# Altium PCB REDESIGN.PcbDoc
Units mil, origin at the board's own origin, x right, y up, seen from the top; angles counter-clockwise.
Board outline 3007 x 6280 mil, 2 copper layers (Top Layer, Bottom Layer); 69 components, 59 nets, 325 pads, 16 vias.
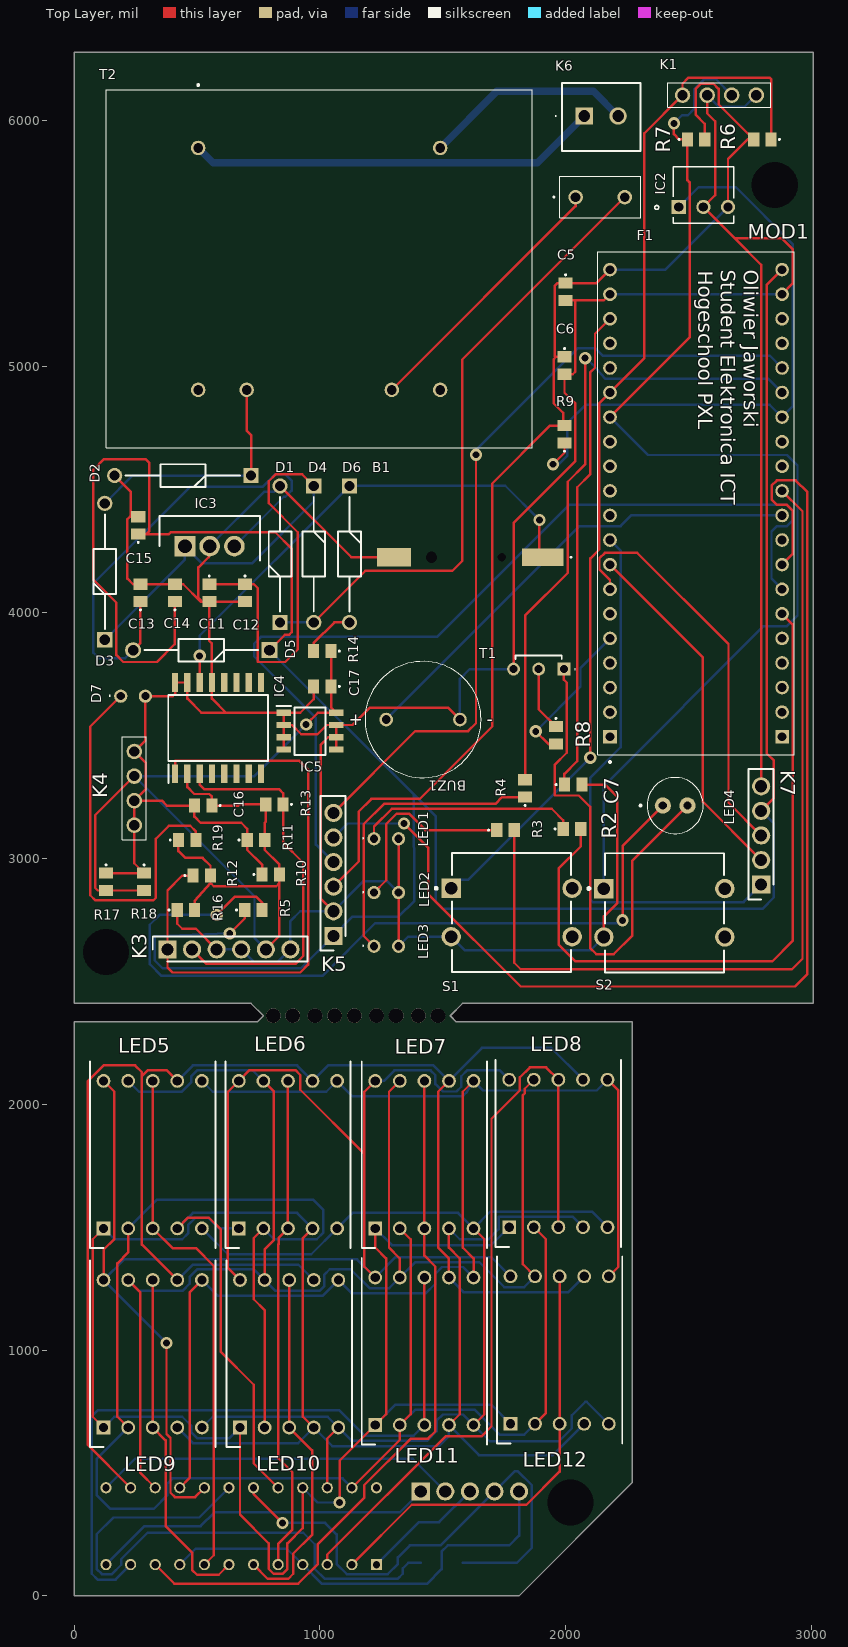
[diagram p0: Top Layer view]
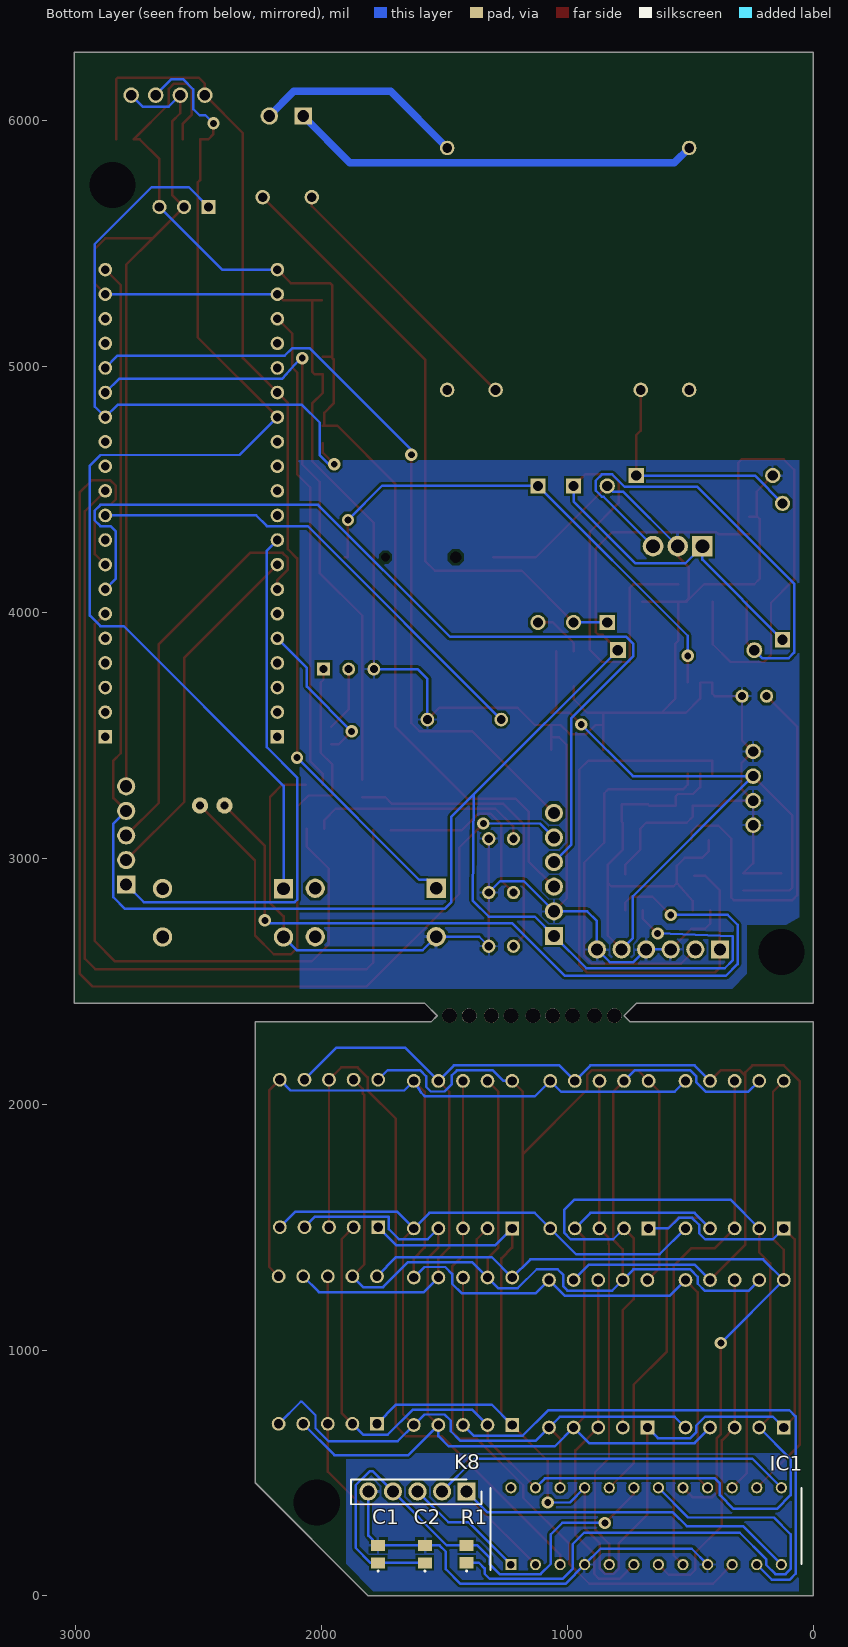
[diagram p1: Bottom Layer view, seen from below]
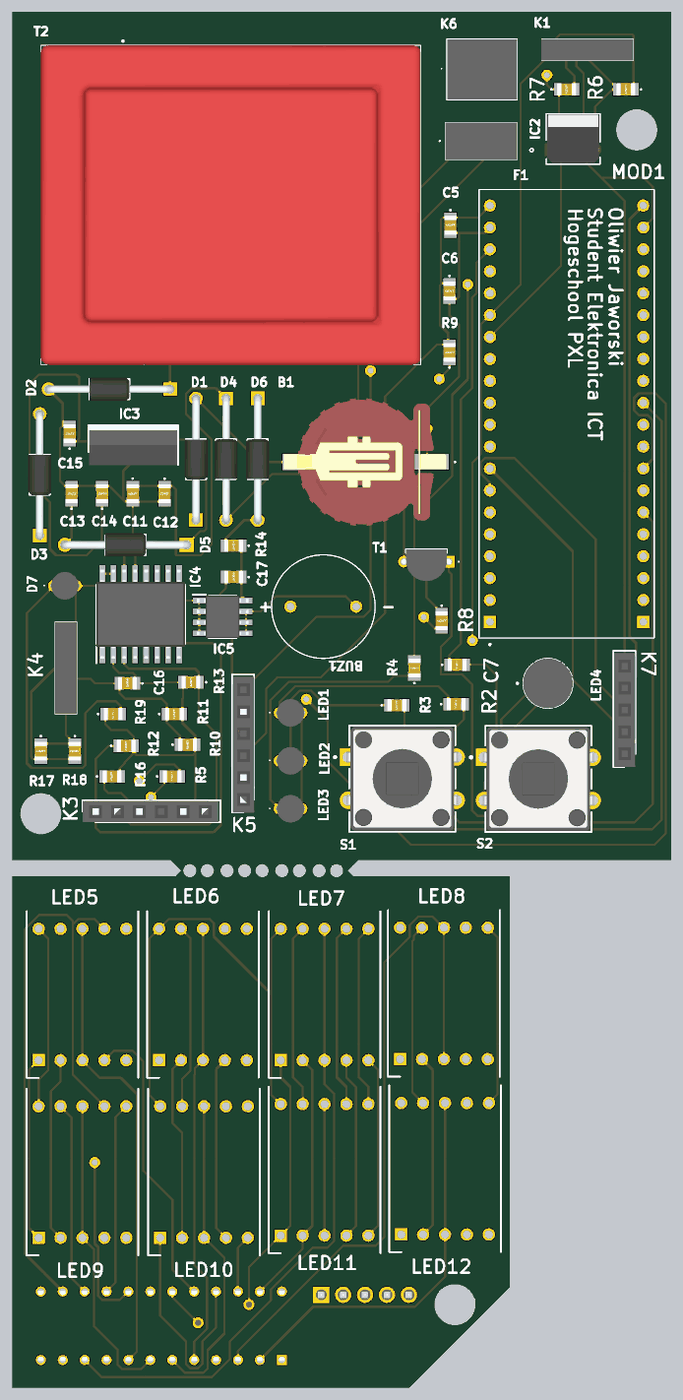
[diagram p2: 3D render of the assembled board from above, using the file's embedded part models]
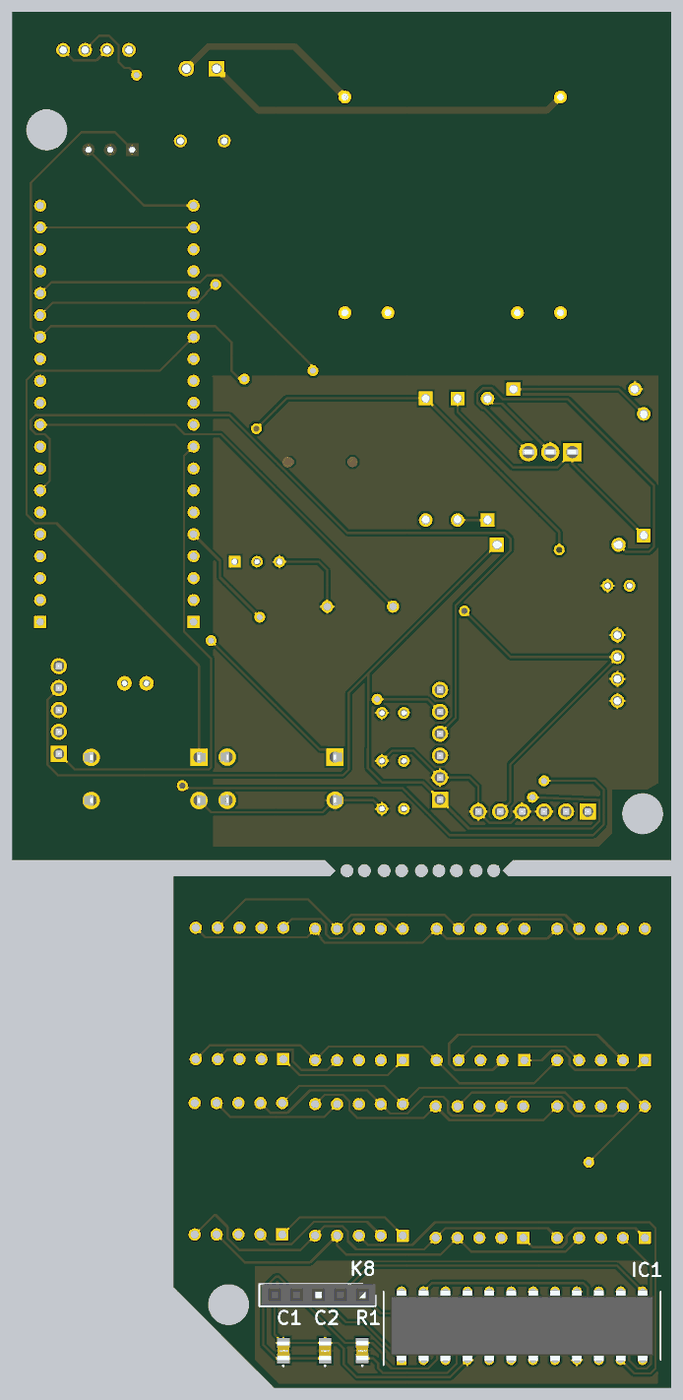
[diagram p3: 3D render of the assembled board from below, using the file's embedded part models]

## Layer stack, top to bottom
Top Solder: solder mask 0.4, Solder Resist, Dk 3.5
Top Layer: signal copper 1.4
Dielectric 1: dielectric 12.6, FR-4, Dk 4.8
Bottom Layer: signal copper 1.4
Bottom Solder: solder mask 0.4, Solder Resist, Dk 3.5

## Board outline
0,2410 720,2410 770,2360 745,2335 0,2335 0,0 1810,0 2270,460 2270,2335 1555,2335 1530,2360 1580,2410 3007,2410 3007,6280 0,6280

## Design rules (kind name [scope] priority, off if disabled: settings)
Clearance [All] p1: gap=10 ignorepadtopadclearanceinfootprint=FALSE
Height [All] p1: minheight=0 maxheight=2000 prefheight=500
HoleSize [All] p1: absolutevalues=TRUE maxlimit=200 minlimit=1 maxpercent=80.000 minpercent=20.000
MinimumSolderMaskSliver [All] p1: minsoldermaskwidth=5
PolygonConnect [All] p1: connectstyle=Relief reliefconductorwidth=10 reliefentries=4 polygonreliefangle="90 Angle" airgapwidth=10
RoutingVias [All] p1: holewidth=28 width=50 viastyle="Through Hole" minholewidth=28 minwidth=50 maxholewidth=28 maxwidth=50
SilkToSolderMaskClearance [IsPad] p1: minsilkscreentomaskgap=4 clearancetoexposedcopper=TRUE
SolderMaskExpansion [All] p1: expansion=4 istentingtop=FALSE
Width [All] p1: maxlimit=30 minlimit=10 preferedwidth=10 minimp=50.000000 maximp=50.000000 favimp=50.000000
26 further rules are at their usual default settings.

## Classes and differential pairs
component class RTC_unit: B1 C16 C17 D6 D7 IC4 IC5 K3 K4 R10 R11 R12 R13 R14 R16 R17 R18 R19
component class Processing_Unit: BUZ1 C5 C6 C7 IC2 K1 K5 K7 LED1 LED2 LED3 LED4 MOD1 R2 R3 R4 R5 R6 R7 R8 R9 S1 S2 T1
component class Power_Unit: C11 C12 C13 C14 C15 D1 D2 D3 D4 D5 F1 IC3 K6 T2
component class Display_Unit: C1 C2 IC1 K8 LED5 LED6 LED7 LED8 LED9 LED10 LED11 LED12 R1

## Components (designator, comment, footprint, x,y, rotation, side; value= is the part's Value field where it differs from the comment)
B1 "CR1220" CR1220HSMD 1602.06,4225 r180 top
BUZ1 "CEM-1212S" CUI_CEM-1212S 1419.61,3565 r0 top
C1 "100uF | 16V" C0805 1770,170 r90 bottom
C2 "100nF | 16V" C0805 1580,170 r90 bottom
C5 "47uF | 16V" C0805 1999.7,5305 r270 top
C6 "100nF" C0805 1995,5005 r270 top
C7 "1uF | 16V" C0805 2030,3300 r0 top
C11 "470uF" C0805 550,4080 r270 top
C12 "0.1uF" C0805 695,4080 r270 top
C13 "0.1uF" C0805 270,4080 r90 top
C14 "100nF" C0805 410.07,4080 r90 top
C15 "220uF | 16v" C0805 260.99,4354.57 r90 top
C16 "0.1uF" C0805 525,3215 r180 top
C17 "1uF" C0805 1010,3700 r180 top
D1 "1N4001" DIOAD1405W86L465D235 838.1,3959.88 r90 top
D2 "1N4001" DIOAD1405W86L465D235 720.12,4557.16 r180 top
D3 "1N4001" DIOAD1405W86L465D235 125,3889.19 r90 top
D4 "1N4001" DIOAD1405W86L465D235 975,4515 r270 top
D5 "1N5817" 1n5817_footprint 795.12,3847 r180 top
D6 "1N4148,133" DIOAD1405W86L465D235 1120,4515.12 r270 top
D7 "TLHO4200" TLHO4200 240,3660 r0 top
F1 "MCMSF_1A_250V" MCMSF1A250V 2040,5690 r0 top
IC1 "MAX7219CNG" DIP794W56P254L3054H457Q24N 680,283.7 r90 bottom
IC2 "TSOP34338" TO_TSOP31236 2660,5748 r0 top
IC3 "L78M05CP" TO255P460X1020X2030-3P 451.12,4270 r0 top
IC4 "DS3231SN#" SOIC127P1032X265-16N 585.76,3530 r90 top
IC5 "AT24C32D-SSHM-B" SOIC127P600X175-8N 960,3517.75 r0 top
K1 "2212S-04SG-85" 2212S04SG85 2475,6105 r0 top
K3 "2212S-06SG-85" RHDR6W74P0X254_1X6_1574X250X850P 380,2630 r0 top
K4 "2212S-04SG-85" 2212S04SG85 245,3135 r90 top
K5 "2212S-06SG-85" RHDR6W74P0X254_1X6_1574X250X850P 1055,2685 r90 top
K6 "OSTTE020104" OSTTE020104 2075,6020 r0 top
K7 "2212S-05SG-85" RHDR5W74P0X254_1X5_1320X250X850P 2795,2893.45 r90 top
K8 "2212S-05SG-85" RHDR5W74P0X254_1X5_1320X250X850P 1410,425 r0 bottom
LED1 "TLHO4200" TLHO4200 1270,3080 r0 top
LED2 "TLHO4200" TLHO4200 1270,2861.33 r0 top
LED3 "TLHO4200" TLHO4200 1270,2642.66 r0 top
LED4 "TSAL6400" TSAL6400 2395,3215 r0 top
LED5 "SC56-11EWA" DIPS1524W75P254L1270H825Q10N 120,1495 r90 top
LED6 "SC56-11EWA" DIPS1524W75P254L1270H825Q10N 670,1495 r90 top
LED7 "SC56-11EWA" DIPS1524W75P254L1270H825Q10N 1225,1495 r90 top
LED8 "SC56-11EWA" DIPS1524W75P254L1270H825Q10N 1770,1500 r90 top
LED9 "SC56-11EWA" DIPS1524W75P254L1270H825Q10N 120,685 r90 top
LED10 "SC56-11EWA" DIPS1524W75P254L1270H825Q10N 675,685 r90 top
LED11 "SC56-11EWA" DIPS1524W75P254L1270H825Q10N 1225,695 r90 top
LED12 "SC56-11EWA" DIPS1524W75P254L1270H825Q10N 1775,700 r90 top
MOD1 "ESP32-PICO-KIT-V4.1" XCVR_ESP32-PICO-KIT-V4.1 2530,4445 r90 top
R1 "47K" C0805 1410,170.43 r90 bottom
R2 "820R" C0805 2025.43,3120 r0 top
R3 "330R" C0805 1755,3115 r0 top
R4 "330R" C0805 1835,3284.57 r90 top
R5 "22R" C0805 729.57,2790 r0 top
R6 "10K" C0805 2800,5925 r180 top
R7 "10K" C0805 2530,5925 r0 top
R8 "330R" C0805 1960,3500.43 r270 top
R9 "10K" C0805 1995,4725 r90 top
R10 "4.7k" C0805 800,2935 r0 top
R11 "4.7k" C0805 740,3075 r0 top
R12 "4.7k" C0805 519.57,2929.93 r0 top
R13 "4.7k" C0805 815,3220 r180 top
R14 "220R" C0805 1010,3843.1 r180 top
R16 "4.7k" C0805 455,2790 r0 top
R17 "4.7k" C0805 130,2905 r270 top
R18 "4.7k" C0805 285,2905 r270 top
R19 "1K" C0805 460,3075 r0 top
S1 "FSM103" FP-FSM103-MFG 1780,2779.97 r180 top
S2 "FSM103" FP-FSM103-MFG 2401.06,2778.84 r180 top
T1 "BC33716TA" BC33716TA 1992.36,3770 r180 top
T2 "44230" 44230 505,5890 r0 top

## Footprints (in the part's own frame and the unit in brackets; to place one, negate y for a bottom-side part, rotate by r counter-clockwise, add the part's x,y. Pads: shape width x height; smd on the part's side, far side on the other; paste and mask are expansions set on the pad)
1n5817_footprint [mm]
  rect 1.65x1.65 hole 1.1: 1(0,0)
  round 1.65 hole 1.1: 2(14.1,0)
  silkscreen extent 1.18,-1.18 12.92,1.18, body extent -0.45,-1.34 14.55,1.34, height 2.7
2212S04SG85 [mm]
  round 1.605 hole 1.07: 1(0,0) 2(2.54,0) 3(5.08,0) 4(7.62,0)
  silkscreen extent -1.52,-1.25 9.14,1.25, body extent -1.52,-1.25 9.14,1.25, height 8.8
44230 [mm]
  round 1.5 hole 1: 1(0,0) 5(25,0) 6(25,-25) 7(20,-25) 9(5,-25) 10(0,-25)
  silkscreen extent -9.5,-31 34.5,6.6, body extent -9.5,-31 34.5,6, height 32.3
BC33716TA [mm]
  rect 1.333x1.333 hole 0.82: 1(0,0)
  round 1.333 hole 0.82: 2(2.6,0) 3(5.2,0)
  silkscreen extent -1.2,-1.43 4.98,0.05, body extent -0.31,-1.43 5.51,2.25, height 8.87
C0805 [mm]
  rect 1.15x1.45 smd: 1(-0.9,0) 2(0.9,0)
  silkscreen extent -1.8,-0.05 -1.7,0.05, body extent -1.1,-0.73 1.1,0.72, height 1.4
CR1220HSMD [mm]
  rect 4.32x1.82 smd: 1(-7.73,0)
  rect 3.52x1.87 smd: 2(7.63,0)
  round 0.45 hole 0.9 unplated: MH1(-3.5,0)
  round 0.58 hole 1.16 unplated: MH2(3.75,0)
  silkscreen extent -10.7,-0.05 -10.6,0.05, body extent -9.6,-7.37 9.2,7.38, height 4.21
CUI_CEM-1212S [mm]
  round 1.408 hole 0.9: M(3.81,0) P(-3.81,0)
  silkscreen extent -6,-6 6,6
DIOAD1405W86L465D235 [mm]
  rect 1.575x1.575 hole 1.05: 1(0,0)
  round 1.575 hole 1.05: 2(14.1,0)
  silkscreen extent 1.14,-1.17 12.96,1.17, body extent -0.43,-1.34 14.48,1.34, height 2.7
DIP794W56P254L3054H457Q24N [mm]
  rect 1.16x1.16 hole 0.76: 1(-3.97,13.97)
  round 1.16 hole 0.76: 2(-3.97,11.43) 3(-3.97,8.89) 4(-3.97,6.35) 5(-3.97,3.81) 6(-3.97,1.27) 7(-3.97,-1.27) 8(-3.97,-3.81) 9(-3.97,-6.35) 10(-3.97,-8.89) 11(-3.97,-11.43) 12(-3.97,-13.97) 13(3.97,-13.97) 14(3.97,-11.43) 15(3.97,-8.89) 16(3.97,-6.35) 17(3.97,-3.81) 18(3.97,-1.27) 19(3.97,1.27) 20(3.97,3.81) 21(3.97,6.35) 22(3.97,8.89) 23(3.97,11.43) 24(3.97,13.97)
  silkscreen extent -4.55,-16.06 3.93,16.06, body extent -4.11,-15.27 4.11,15.27, height 4.57
DIPS1524W75P254L1270H825Q10N [mm]
  rect 1.425x1.425 hole 0.95: 1(0,0)
  round 1.425 hole 0.95: 2(0,-2.54) 3(0,-5.08) 4(0,-7.62) 5(0,-10.16) 6(15.24,-10.16) 7(15.24,-7.62) 8(15.24,-5.08) 9(15.24,-2.54) 10(15.24,0)
  silkscreen extent -2.03,-11.56 17.27,1.4
FP-FSM103-MFG [mm]
  rect 2x2 hole 1.3 paste-2539.97 mask+0: 1(6.25,-2.5)
  round 2 hole 1.3 paste-2539.97 mask+0: 2(-6.25,-2.5) 3(6.25,2.5) 4(-6.25,2.5)
  silkscreen extent -6.15,-6.15 7.92,6.15, body extent -7.35,-6.25 7.35,6.25, height 0.25
MCMSF1A250V [mm]
  round 1.5 hole 1: 1(0,0) 2(5.08,0)
  silkscreen extent -2.3,-2.15 6.71,2.15, body extent -1.64,-2.15 6.72,2.15, height 7.8
OSTTE020104 [mm]
  rect 1.8x1.8 hole 1.2: 1(0,0)
  round 1.8 hole 1.2: 2(3.5,0)
  silkscreen extent -3,-3.6 5.8,3.4, body extent -2.3,-3.6 5.8,3.4, height 8.8
RHDR5W74P0X254_1X5_1320X250X850P [mm]
  rect 1.875x1.875 hole 1.25: 1(0,0)
  round 1.875 hole 1.25: 2(2.54,0) 3(5.08,0) 4(7.62,0) 5(10.16,0)
  silkscreen extent -1.52,-1.25 11.93,1.33, body extent -1.52,-1.25 11.68,1.25, height 8.5
RHDR6W74P0X254_1X6_1574X250X850P [mm]
  rect 1.875x1.875 hole 1.25: 1(0,0)
  round 1.875 hole 1.25: 2(2.54,0) 3(5.08,0) 4(7.62,0) 5(10.16,0) 6(12.7,0)
  silkscreen extent -1.52,-1.25 14.47,1.33, body extent -1.52,-1.25 14.22,1.25, height 8.5
SOIC127P600X175-8N [mm]
  rect 1.5x0.65 smd: 1(-2.7,1.905) 2(-2.7,0.635) 3(-2.7,-0.635) 4(-2.7,-1.905) 5(2.7,-1.905) 6(2.7,-0.635) 7(2.7,0.635) 8(2.7,1.905)
  silkscreen extent -3.45,-2.45 1.6,2.58, body extent -3,-2.45 3,2.45, height 1.75
SOIC127P1032X265-16N [mm]
  rect 1.925x0.65 smd: 1(-4.712,4.445) 2(-4.712,3.175) 3(-4.712,1.905) 4(-4.712,0.635) 5(-4.712,-0.635) 6(-4.712,-1.905) 7(-4.712,-3.175) 8(-4.712,-4.445) 9(4.712,-4.445) 10(4.712,-3.175) 11(4.712,-1.905) 12(4.712,-0.635) 13(4.712,0.635) 14(4.712,1.905) 15(4.712,3.175) 16(4.712,4.445)
  silkscreen extent -5.68,-5.15 3.4,5.15, body extent -5.16,-5.15 5.16,5.15, height 2.65
TLHO4200 [mm]
  round 1.365 hole 0.84: 1(-1.27,0) 2(1.27,0)
  silkscreen extent -2.45,0 -2.35,0.1, body extent -1.6,-1.59 1.6,1.59, height 6.2
TO255P460X1020X2030-3P [mm]
  rect 2.13x2.13 hole 1.42: 1(0,0)
  round 2.13 hole 1.42: 2(2.55,0) 3(5.1,0)
  silkscreen extent -2.65,-1.5 7.75,3.1, body extent -2.55,-1.5 7.65,3.1, height 19.4
TO_TSOP31236 [mil]
  rect 58x58 / inner round 60 / far side rect 58x58 hole 38 paste-99999 mask-29: 1(-200,-98)
  round 58 / inner round 60 / far side round 58 hole 38 paste-99999 mask-29: 2(-100,-98) 3(0,-98)
  silkscreen extent -298,-164 23,66, body extent -218,-159 18,61, height 325
TSAL6400 [mm]
  round 1.68 hole 0.85: 1(0,0) 2(2.54,0)
  silkscreen extent -2.4,-2.9 4.17,2.9, body extent -1.63,-2.89 4.17,2.89, height 9.8
XCVR_ESP32-PICO-KIT-V4.1 [mm]
  rect 1.408x1.408 hole 0.9: J2_1(-24.13,8.89) J3_1(-24.13,-8.89)
  round 1.408 hole 0.9: J2_2(-21.59,8.89) J2_3(-19.05,8.89) J2_4(-16.51,8.89) J2_5(-13.97,8.89) J2_6(-11.43,8.89) J2_7(-8.89,8.89) J2_8(-6.35,8.89) J2_9(-3.81,8.89) J2_10(-1.27,8.89) J2_11(1.27,8.89) J2_12(3.81,8.89) J2_13(6.35,8.89) J2_14(8.89,8.89) J2_15(11.43,8.89) J2_16(13.97,8.89) J2_17(16.51,8.89) J2_18(19.05,8.89) J2_19(21.59,8.89) J2_20(24.13,8.89) J3_2(-21.59,-8.89) J3_3(-19.05,-8.89) J3_4(-16.51,-8.89) J3_5(-13.97,-8.89) J3_6(-11.43,-8.89) J3_7(-8.89,-8.89) J3_8(-6.35,-8.89) J3_9(-3.81,-8.89) J3_10(-1.27,-8.89) J3_11(1.27,-8.89) J3_12(3.81,-8.89) J3_13(6.35,-8.89) J3_14(8.89,-8.89) J3_15(11.43,-8.89) J3_16(13.97,-8.89) J3_17(16.51,-8.89) J3_18(19.05,-8.89) J3_19(21.59,-8.89) J3_20(24.13,-8.89)
  silkscreen extent -26.85,-10.15 26,10.15

## Part data
B1: library part CR1220-H-SMD, "Integrated Circuit", Manufacturer_Name=ROBOTIS, Datasheet Link=https://www.robotics.org.za/CR1220-H-SMD, Height=4.1mm, Manufacturer_Part_Number=CR1220-H-SMD
BUZ1: "12 mm, 12 V, 85 dB, Through Hole, Sealed, Magnetic Audio Transducer Buzzer", Package="TO-220 CUI Inc.", Arrow_Electronics-Purchase-URL=https://snapeda.com/shop?store=Arrow+Electronics&id=601563, Availability=Good, CUI_purchase_URL=https://www.cuidevices.com/product/audio/buzzers/audio-transducers/cem-1212s?utm_source=snapeda.com&utm_medium=referral&utm_campaign=snapedaBOM, DigiKey-Purchase-URL=https://snapeda.com/shop?store=DigiKey&id=601563, MF="CUI Devices", Mouser-Purchase-URL=https://snapeda.com/shop?store=Mouser&id=601563, MP=CEM-1212S, Price=None, SnapEDA_Link=https://www.snapeda.com/parts/CEM-1212S/CUI%20Devices/view-part/601563/?ref=snap
C1 C5 C7 C11 C15: library part elektrolytischeC0805, "0805 ceramic capacitor", Arrow Part Number=GRM188R71H103KA01D, Manufacturer_Name="Murata Electronics", Mouser Part Number=81-GRM39X103K50D, Arrow Price/Stock=https://www.arrow.com/en/products/grm188r71h103ka01d/murata-manufacturing?region=europe, Datasheet Link=https://datasheet.datasheetarchive.com/originals/distributors/Datasheets_SAMA/ec4f1577dddcc7a13ddad897a28002d3.pdf, Height=0.9mm, Manufacturer_Part_Number=GRM188R71H103KA01D, Mouser Price/Stock=https://www.mouser.co.uk/ProductDetail/Murata-Electronics/GRM188R71H103KA01D?qs=WWniysbtxULrL2ljbViAbw%3D%3D
C2 C6 C12 C13 C14 C16 C17: library part KeramischeC0805_1, "0805 ceramic capacitor", Arrow Part Number=GRM188R71H103KA01D, Manufacturer_Name="Murata Electronics", Mouser Part Number=81-GRM39X103K50D, Arrow Price/Stock=https://www.arrow.com/en/products/grm188r71h103ka01d/murata-manufacturing?region=europe, Datasheet Link=https://datasheet.datasheetarchive.com/originals/distributors/Datasheets_SAMA/ec4f1577dddcc7a13ddad897a28002d3.pdf, Height=0.9mm, Manufacturer_Part_Number=GRM188R71H103KA01D, Mouser Price/Stock=https://www.mouser.co.uk/ProductDetail/Murata-Electronics/GRM188R71H103KA01D?qs=WWniysbtxULrL2ljbViAbw%3D%3D
D1 D2 D3 D4: "Diode", Manufacturer_Name=Vishay, Datasheet Link=https://www.vishay.com/docs/88503/1n4001.pdf, Manufacturer_Part_Number=1N4001
D5: "Schottky Diode", Manufacturer_Name=Rectron, Arrow Part Number=1N5817, Arrow Price/Stock=https://www.arrow.com/en/products/1n5817/rectron?region=nac, Datasheet Link=https://www.arrow.com/en/products/1n5817/rectron, Manufacturer_Part_Number=1N5817
D6: "Diode", Manufacturer_Name=Nexperia, Mouser Part Number=771-1N4148,133, Arrow Part Number=1N4148,133, Arrow Price/Stock=https://www.arrow.com/en/products/1n4148133/nxp-semiconductors, Datasheet Link=https://assets.nexperia.com/documents/data-sheet/1N4148_1N4448.pdf, Manufacturer_Part_Number=1N4148,133, Mouser Price/Stock=https://www.mouser.co.uk/ProductDetail/Nexperia/1N4148133?qs=elmhQ6eFu7hy8ApvpFxPZg%3D%3D
D7 LED1 LED2 LED3: "LED", Manufacturer_Name=Vishay, Datasheet Link=https://www.mouser.com/datasheet/2/427/tlhg420-1767350.pdf, Height=6.1mm, Manufacturer_Part_Number=TLHO4200
F1: "Fuse", Manufacturer_Name="Multicomp Pro", Manufacturer_Part_Number="MCMSF 1A 250V", Datasheet Link=https://componentsearchengine.com/Datasheets/2/MCMSF%201A%20250V.pdf, Height=7.7mm
IC1: "Integrated Circuit", Manufacturer_Name="Analog Devices", Mouser Part Number=700-MAX7219CNG-NR, Datasheet Link=https://datasheets.maximintegrated.com/en/ds/MAX7219-MAX7221.pdf, Height=4.572mm, Manufacturer_Part_Number=MAX7219CNG, Mouser Price/Stock=https://www.mouser.co.uk/ProductDetail/Maxim-Integrated/MAX7219CNG?qs=p6VZ%252BklCkRToQRlZGegBBA%3D%3D
IC2: "No Description Available", Mfr_Name=Vishay, RefDes=RefDes, Type=Type
IC3: "Integrated Circuit", Manufacturer_Name=STMicroelectronics, Mouser Part Number=511-L78M05CP, Arrow Part Number=L78M05CP, Arrow Price/Stock=https://www.arrow.com/en/products/l78m05cp/stmicroelectronics?region=europe, Datasheet Link=http://www.st.com/web/en/resource/technical/document/datasheet/CD00000447.pdf, Height=4.6mm, Manufacturer_Part_Number=L78M05CP, Mouser Price/Stock=https://www.mouser.co.uk/ProductDetail/STMicroelectronics/L78M05CP?qs=W%252B4obUA0F3anQylSbAkrfw%3D%3D
IC4: "Integrated Circuit", Manufacturer_Name="Analog Devices", Mouser Part Number=700-DS3231SN#, Arrow Part Number=DS3231SN#, Arrow Price/Stock=https://www.arrow.com/en/products/ds3231sn/analog-devices?region=europe, Datasheet Link=https://datasheets.maximintegrated.com/en/ds/DS3231.pdf, Height=2.65mm, Manufacturer_Part_Number=DS3231SN#, Mouser Price/Stock=https://www.mouser.co.uk/ProductDetail/Analog-Devices-Maxim-Integrated/DS3231SN?qs=1eQvB6Dk1vhUlr8%2FOrV0Fw%3D%3D
IC5: "Integrated Circuit", Manufacturer_Name=Microchip, Mouser Part Number=556-AT24C32D-SSHM-B, Arrow Part Number=AT24C32D-SSHM-B, Arrow Price/Stock=https://www.arrow.com/en/products/at24c32d-sshm-b/microchip-technology?region=europe, Datasheet Link=http://www.atmel.com/images/atmel-8866-seeprom-at24c32d-datasheet.pdf, Height=1.75mm, Manufacturer_Part_Number=AT24C32D-SSHM-B, Mouser Price/Stock=https://www.mouser.co.uk/ProductDetail/Microchip-Technology/AT24C32D-SSHM-B?qs=ZZMt4ii29sN2mTRLl%2FnVJA%3D%3D
K1 K3 K4 K5 K7 K8: "Connector", Manufacturer_Name="Multicomp Pro"
  K1 K4: Datasheet Link=https://componentsearchengine.com/Datasheets/5/2212S-04SG-85.pdf, Height=8.7mm, Manufacturer_Part_Number=2212S-04SG-85
  K3 K5: Datasheet Link=http://www.farnell.com/datasheets/2290158.pdf?_ga=2.3406896.1671530057.1506933545-2008293027.1497013038, Height=8.5mm, Manufacturer_Part_Number=2212S-06SG-85
  K7 K8: Datasheet Link=https://componentsearchengine.com/Datasheets/2/2212S-05SG-85.pdf, Height=8.5mm, Manufacturer_Part_Number=2212S-05SG-85
K6: "Connector", Manufacturer_Name="On Shore Technology Inc.", Datasheet Link=https://datasheet.datasheetarchive.com/originals/dk/DKDS-18/336634.pdf, Height=8.7mm, Manufacturer_Part_Number=OSTTE020104
LED4: "LED", Manufacturer_Name=Vishay, Mouser Part Number=782-TSAL6400, Arrow Part Number=TSAL6400, Arrow Price/Stock=https://www.arrow.com/en/products/tsal6400/vishay?region=nac, Datasheet Link=https://componentsearchengine.com/Datasheets/1/TSAL6400.pdf, Height=9.7mm, Manufacturer_Part_Number=TSAL6400, Mouser Price/Stock=https://www.mouser.co.uk/ProductDetail/Vishay-Semiconductors/TSAL6400?qs=oSAwVt7aKTHCOCv1ythi7g%3D%3D
LED5 LED6 LED7 LED8 LED9 LED10 LED11 LED12: "Display", Manufacturer_Name=Kingbright, Mouser Part Number=604-SC56-11EWA, Datasheet Link=https://www.kingbrightusa.com/images/catalog/SPEC/SC56-11EWA.pdf, Height=8.25mm, Manufacturer_Part_Number=SC56-11EWA, Mouser Price/Stock=https://www.mouser.co.uk/ProductDetail/Kingbright/SC56-11EWA?qs=y3UkhjaxUTZA9319us7IBQ%3D%3D
MOD1: "WiFi Development Tools (802.11)", Package=None, Availability=Bad, Check_prices=https://www.snapeda.com/parts/ESP32-PICO-KIT-V4.1/Espressif%20Systems/view-part/3211113/?ref=eda, MF="Espressif Systems", MP=ESP32-PICO-KIT-V4.1, Price=None, SnapEDA_Link=https://www.snapeda.com/parts/ESP32-PICO-KIT-V4.1/Espressif%20Systems/view-part/3211113/?ref=snap
R1 R2 R3 R4 R5 R6 R7 R8 R9 R10 R11 R12 R13 R14 R16 R17 R18 R19: library part Resistor0805, "Resistor0805", Arrow Part Number=CRCW08050000Z0EAHP, Manufacturer_Name=Vishay, Mouser Part Number=71-CRCW08050000Z0EAH, Arrow Price/Stock=https://www.arrow.com/en/products/crcw08050000z0eahp/vishay?region=nac, Datasheet Link=https://componentsearchengine.com/Datasheets/1/CRCW08051R00FKEAHP.pdf, Height=0.6mm, Manufacturer_Part_Number=CRCW08050000Z0EAHP, Mouser Price/Stock=https://www.mouser.co.uk/ProductDetail/Vishay-Dale/CRCW08050000Z0EAHP?qs=pTGEtN%252BMLlDLrJUqQmN2jA%3D%3D
S1 S2: library part CMP-03407-000037-1, "SWITCH TACTILE SPST-NO 0.05A 24V", Actuator Color=Black, Contact Current Rating=50mA, Contact Resistance=100mR, Max Operating Temperature=85°C, Max Voltage Rating (DC)=12V, Min Operating Temperature=-35°C, Operating Force=1.57N, Package Quantity=400, Voltage Rating=24V, Actuator Length=3.4mm, Actuator Material=Polyester, Contact Material=Brass, Contact Plating=Silver, Current Rating=50mA, Depth=14.1mm, Electrical Life=100000Cycles, Illumination Type=Non-Illuminated, Length=12mm, Max Current Rating=50mA, Mechanical Life=100000Cycles, Mount="Through Hole", Orientation=Straight, Packaging="Loose Piece", Radiation Hardening=No, RoHS Compliant=Yes, Series="FSM100 ~ 104", Switch Function=Off-Mom, Switch Travel=0.3mm, Termination="PC Pins", Throw Configuration=SPST, Type=Switch, Voltage Rating (DC)=12V, Width=12mm
T1: "Transistor BJT NPN", Manufacturer_Name=onsemi, Mouser Part Number=512-BC33716TA, Arrow Part Number=BC33716TA, Arrow Price/Stock=https://www.arrow.com/en/products/bc33716ta/on-semiconductor?region=nac, Datasheet Link=https://rocelec.widen.net/view/pdf/hcqqbqwrik/ONSM-S-A0003590550-1.pdf?t.download=true&u=5oefqw, Height=8.77mm, Manufacturer_Part_Number=BC33716TA, Mouser Price/Stock=https://www.mouser.co.uk/ProductDetail/onsemi-Fairchild/BC33716TA?qs=UMEuL5FsraA5fR076NzQDQ%3D%3D
T2: "Transformer", Manufacturer_Name=MYRRA, Arrow Part Number=44230, Arrow Price/Stock=https://www.arrow.com/en/products/44230/myrra?region=europe, Datasheet Link=https://componentsearchengine.com/Datasheets/2/44230.pdf, Height=32.8mm, Manufacturer_Part_Number=44230

## Free pads (board coordinates)
  round 60 hole 60 unplated mask+0: 16(810,2360) 16(890,2360) 16(980,2360) 16(1060,2360) 16(1140,2360) 16(1230,2360) 16(1310,2360) 16(1400,2360) 16(1480,2360)
  round 60 hole 187.5 unplated paste-99999 mask+0: 17(130,2620) 17(2020,380) 17(2850,5740)

## Via types
v1: diameter 50, hole 28, Top Layer to Bottom Layer, 16 vias

## Nets (pads, with @x,y where several pads share a name; then routed paths per layer and width w, separated by ;. In a path a pad name is that pad's centre, name@x,y a point inside that pad or via, vN(x,y) a via of type N, cw(c..) or ccw(c..) an arc to the next point about the centre after c; other vN are vias at no path point)
+3V3: C5.1 C6.1 IC2.3 K5.3 MOD1.J2_20 R6.2 R7.2 R9.2 | length 4808.9
  Top Layer w10: K5.3 1158.13,2988.13 1158.13,3190.64 1209.49,3242 1406,3242 1701,3537 1701,4525 1936.43,4760.43 R9.2@1989,4760.43 ; R9.2 R9.2@1989,4760.43 ; C6.1 1961.43,5040.43 ; MOD1.J2_20 2125.43,5340.43 C5.1 1966.43,5340.43 1956,5330 1956,5040.43 1961.43,5040.43 ; R7.2 2565.43,5988 2528,6025.43 2528,6130 2550,6152 2600,6152 2622,6130 2622,6067.57 R6.2 2740,5925 2660,5845 IC2.3 ; 1961.43,5040.43 1951,5030 1951,4851 1989,4813 R9.2@1989,4760.43
  Bottom Layer w10: MOD1.J2_20 2405,5395 IC2.3
+5: C14.1 C15.1 D5.1 K5.1 K7.4 MOD1.J3_20 R5.1 | length 10391.1
  Top Layer w10: C15.1 294.13,4319.13 ; C14.1 409,4044.57 409,3871 337,3799 200,3799 172,3827 172,4040 78,4134 78,4581 120,4623 292,4623 305,4610 305,4330 294.13,4319.13 ; v1(633.13,2695) 694.13,2756 R5.1 ; D5.1 857.12,3909 874,3909 885,3920 885,4260.54 818.54,4327 394,4327 386.13,4319.13 294.13,4319.13 ; K7.4 2847,3245.45 2847,3398 2817.28,3427.72 2817.28,5332.28 MOD1.J3_20
  Bottom Layer w10: v1(633.13,2695) 328,2683 328,2585 360,2553 923,2553 K5.1 1133,2763 1320,2763 1384.5,2827.5 1382,3260.12 ; D5.1 1382,3260.12 ; K7.4 2847,3141.45 2847,2842 2800,2795 1500,2795 1472,2823 1472,3170.12 1382,3260.12
+VRTC: C16.1 C17.1 IC4.2 IC5.8 K3.5 K4.3 R10.2 R11.2 R12.2 R13.2 R14.1 R16.2 R17.2 R18.2 R19.1 | length 4601.2
  Top Layer w10: K4.3 86,3176 86,2880 96.43,2869.57 R17.2 R18.2 ; R19.1 424.57,3030 452.57,3002 523,3002 555,2970 R12.2 555,2900 ; IC4.2 460.76,3290 488.76,3262 550,3262 560.43,3251.57 C16.1 667,3215 672,3220 R13.2 779.57,3149.13 775.43,3145 R11.2 775.43,3035 835.43,2975 R10.2 835.43,2900 ; R16.2 490.43,2827 555,2900 ; K3.5 835.43,2685.43 835.43,2900 ; v1(944,3545) 991.75,3592.75 IC5.8 1045.43,3613.61 C17.1 R14.1 ; 555,2900 568,2887 822.43,2887 835.43,2900
  Bottom Layer w10: K3.5 734,2676 734,2846 K4.3 734,3335 v1(944,3545)
GND: B1.2 BUZ1.M C5.2 C6.2 C7.2 C11.2 C12.2 C13.2 C14.2 C15.2 C16.2 C17.2 D1.2 D2.2 D7.2 IC2.2 IC3.2 IC4.13 IC4.15 IC4.16 IC5.1 IC5.2 IC5.3 IC5.4 IC5.5 IC5.6 IC5.7 K1.2 K1.4 K3.3 K3.4 K3.6 K4.1 K4.2 K4.4 K5.2 K7.5 LED1.2 LED2.2 LED3.2 MOD1.J2_19 MOD1.J3_19 R10.1 R11.1 R16.1 R17.1 R18.1 S1.3 S2.3 T1.3 | length 17036.8
  Top Layer w10: R17.1 R18.1 245,2980.43 K4.1 K4.2 ; D2.2 230,4492.16 230,4390 ; C15.2 230,4390 ; R16.1 419.57,2734.43 440,2714 496,2714 K3.3 ; IC3.2 548,4270 548,4226 506,4184 506,4058.57 520,4044.57 ; C12.2 C11.2 ; R10.1 764.57,2975 704.57,3035 R11.1 704.57,3120.43 680,3145 514.57,3145 489.57,3170 C16.2 377,3215 357,3235 K4.2 ; D1.2 1128.1,4225 B1.2 ; IC5.4 IC5.3 IC5.2 ; C17.2 974.57,3647.31 920,3592.75 IC5.1 ; K5.2 1003,2837 1003,3462 1033.75,3492.75 IC5.6 ; IC5.5 IC5.6 ; LED3.2 LED2.2 LED1.2 ; BUZ1.M 1522.61,3612 1202.25,3612 1133,3542.75 IC5.7 ; T1.3 1787.64,4364.64 2039,4616 2039,4850 1995,4894 C6.2 2028.57,4969.57 2039,4980 2039,5269.57 ; C5.2 2039,5269.57 ; C7.2 2160,3300 2210,3250 2210,2819 2155,2764 S2.3 ; MOD1.J2_19 2154.57,5269.57 2039,5269.57 ; K1.2 2575,6031 2608,5998 2608,5698 IC2.2 2688,5522 ; K7.5 2795,5415 2688,5522 ; MOD1.J3_19 2923,5338 2923,5479 2880,5522 2688,5522 ; 230,4390 227,4390 217,4380 217,4138.43 240,4115.43 C13.2 C14.2 444,4115.43 514.87,4044.57 520,4044.57 ; K4.2 292,3282 292,3388 K4.4 290,3480 D7.2 400.76,3660 410.76,3670 IC4.16 IC4.15 460.76,3650 518.01,3592.75 618.01,3592.75 ; 520,4044.57 C11.2 ; C11.2 550,3884.76 560.76,3874 IC4.13 560.76,3650 618.01,3592.75 ; 618.01,3592.75 IC5.1 ; IC5.2 886.28,3542.75 924.03,3504.99 990,3504.99 1027.75,3542.75 IC5.7 ; IC5.2 IC5.1 ; IC5.6 IC5.7
  Bottom Layer w10: IC3.2 772.67,4491.15 814.25,4491.15 D1.2 ; K3.3 K3.4 732,2578 828,2578 K3.6 880,2745 920,2785 K5.2 1178,2908 1273.33,2908 LED2.2 ; LED3.2 1358.89,2681.55 S1.3 1588.48,2627 2101.59,2627 S2.3 ; BUZ1.M 1569.61,3730 1609.61,3770 T1.3 ; MOD1.J2_19 MOD1.J3_19 ; K1.2 2622,6058 2728,6058 K1.4
NetB1_1: B1.1 D6.1 IC4.14 | length 2048.8
  Top Layer w10: IC4.14 v1(510.76,3824) ; v1(1893,4377) 1893,4225 B1.1
  Bottom Layer w10: v1(510.76,3824) 510.76,3905.88 D6.1 1120,4516 1754,4516 v1(1893,4377)
NetBUZ1_P: BUZ1.P MOD1.J3_10 | length 1954.2
  Bottom Layer w10: BUZ1.P 2056.61,4352 2223,4352 2266,4395 MOD1.J3_10
NetC1_1: C1.1 C2.1 IC1.19 K8.4 R1.2 | length 2137.1
  Top Layer w10: IC1.19 730,415 v1(848,297)
  Bottom Layer w10: v1(848,297) 1021,297 1068,250 1068,130 1109,89 1276,89 1317,130 1317,156.87 1366,205.87 R1.2 1490.87,205.87 K8.4 1793,508 1804,508 1862,450 1862,196 1800.57,134.57 C1.1 C2.1
NetC1_2: C1.2 C2.2 IC1.4 IC1.9 K8.5 | length 1768.8
  Bottom Layer w10: IC1.9 494.68,192.09 865.32,192.09 IC1.4 1008.4,49 1435,49 1495,109 1495,180.43 1520,205.43 C2.2 C1.2 1810,245.43 K8.5
NetC7_1: C7.1 MOD1.J2_18 | length 1971.8
  Top Layer w10: C7.1 1994.57,3343.57 2047,3396 2047,4510 2099,4562 2099,4975.84 2119,4995.84 2119,5134 MOD1.J2_18
NetC11_1: C11.1 C12.1 D3.1 D4.1 IC3.1 | length 2871.6
  Top Layer w10: C11.1 C12.1 731.57,4115.43 747,4100 747,3799 859,3799 910,3850 910,4327 792,4445 792,4534 820,4562 928,4562 D4.1
  Bottom Layer w10: D3.1 451.12,4215.31 IC3.1 521.12,4200 723,4200 975,4452 D4.1
NetC13_1: C13.1 D5.2 IC3.3 | length 2044.3
  Top Layer w10: D5.2 270,3877 C13.1
  Bottom Layer w10: D5.2 208,3815 100,3815 78,3837 78,4118 471,4511 767,4511 818,4562 860,4562 885,4537 885,4496 860,4471 852.91,4471 IC3.3
NetD1_1: D1.1 D4.2 F1.2 | length 2598.3
  Top Layer w10: D4.2 1185.12,4170 1539,4170 1579,4210 1579,5029 F1.2
  Bottom Layer w10: D1.1 D4.2
NetD2_1: D2.1 D3.2 T2.9 | length 998
  Top Layer w10: T2.9 701.85,4740.27 720.12,4722 D2.1
  Bottom Layer w10: D3.2 237.85,4557.16 D2.1
NetD6_2: D6.2 R14.2 | length 212.9
  Top Layer w10: R14.2 974.57,3875.57 1059,3960 D6.2
NetD7_1: D7.1 R19.2 | length 1610.5
  Top Layer w10: D7.1 66,3536 66,2850 87,2829 322,2829 333,2840 333,3080 386,3133 472.43,3133 495.43,3110 R19.2
NetF1_1: F1.1 T2.7 | length 1093.9
  Top Layer w10: T2.7 2040,5653.35 F1.1
NetIC1_1: IC1.1 K8.3 | length 503.3
  Bottom Layer w10: IC1.1 1402.6,300 1485,300 K8.3
NetIC1_2: IC1.2 LED12.3 LED12.8 | length 1795.8
  Top Layer w10: IC1.2 1373.6,371 1840,371 1975,506 LED12.3 LED12.8
NetIC1_3: IC1.3 LED8.3 LED8.8 | length 3186.2
  Top Layer w10: IC1.3 1030,168 1511,649 1657,649 1698,690 1698,1940.95 1813.05,2056 1813.05,2109.16 1853.9,2150 1920,2150 LED8.8 LED8.3
NetIC1_5: IC1.5 LED6.3 LED6.8 | length 2031.4
  Top Layer w10: IC1.5 830,212 888,270 888,503 831,560 831,1429.9 833.05,1431.95 833.05,1458.05 LED6.3 LED6.8
NetIC1_6: IC1.6 LED10.3 LED10.8 | length 1459.1
  Top Layer w10: IC1.6 787.84,69.57 871.07,69.57 891.5,90 891.5,171.87 968,248.37 968,592 LED10.3 LED10.8
NetIC1_7: IC1.7 LED9.3 LED9.8 | length 1420.7
  Top Layer w10: LED9.8 LED9.3 372.16,632.84 372.16,283.84 480,176 480,106 500,86 588.6,86 IC1.7
NetIC1_8: IC1.8 LED5.3 LED5.8 | length 2141.7
  Top Layer w10: LED5.8 LED5.3 400.47,1414.53 495.47,1414.53 568,1342 568,165.4 IC1.8
NetIC1_10: IC1.10 LED7.3 LED7.8 | length 2949.4
  Top Layer w10: IC1.10 407.84,49.57 911.57,49.57 992,130 992,211 1180,399 1180,450 1370,640 1440,640 1469,669 1469,1340 1425,1384 LED7.3 LED7.8
NetIC1_11: IC1.11 LED11.3 LED11.8 | length 2857.7
  Top Layer w10: LED11.3 LED11.8
  Bottom Layer w10: IC1.11 169.06,66.46 95.54,66.46 72,90 72,730 98,756 1077.9,756 1181.95,651.95 1381.95,651.95 LED11.3
NetIC1_12: IC1.12 K8.1 | length 1403.3
  Bottom Layer w10: IC1.12 286.6,284 515,284 571,340 1325,340 K8.1
NetIC1_13: IC1.13 K8.2 | length 1483.8
  Bottom Layer w10: IC1.13 247.84,557.84 1377.16,557.84 K8.2
NetIC1_14: IC1.14 LED5.7 LED6.7 LED7.7 LED8.7 LED9.7 LED10.7 LED11.7 LED12.7 | length 6969
  Top Layer w10: IC1.14 56,614 56,2094 120,2158 248,2158 276,2130 276,2115 ; LED9.7 276,1429 276,2115 ; LED5.7 376,2139 300,2139 276,2115 ; LED11.7 1525,1373 1481,1417 1481,2051 LED7.7
  Bottom Layer w10: LED9.7 483.05,1348.05 911.95,1348.05 LED10.7 ; LED5.7 483.05,2158.05 906.95,2158.05 LED6.7 1033.05,2158.05 1461.95,2158.05 LED7.7 1659,2229 1941,2229 LED8.7 ; LED11.7 1584,1236 2011,1236 LED12.7
NetIC1_15: IC1.15 LED5.9 LED6.9 LED7.9 LED8.9 LED9.9 LED10.9 LED11.9 LED12.9 | length 6008.1
  Top Layer w10: LED9.9 270,1235 270,500 IC1.15 ; LED6.9 813.05,2051.95 813.05,1448 775,1409.95 LED10.9 ; LED11.9 1325,1373 1281,1417 1281,2051 LED7.9 ; LED8.9 1833.05,2063.05 1833.05,2044 1826,2036.95 1826,1349 LED12.9
  Bottom Layer w10: LED9.9 264,1241 441,1241 470,1270 470,1298.05 500,1328.05 731.95,1328.05 LED10.9 818.05,1241.95 1000,1241.95 1018.05,1260 1018.05,1307.05 1040,1329 1125,1329 1202.05,1251.95 1281.95,1251.95 LED11.9 1388.05,1358.05 1647.95,1358.05 1750,1256 1831,1256 LED12.9 ; LED5.9 265,2050 436.95,2050 476.95,2090 476.95,2115 500,2138.05 726.95,2138.05 LED6.9
NetIC1_16: IC1.16 LED5.6 LED6.6 LED7.6 LED8.6 LED9.6 LED10.6 LED11.6 LED12.6 | length 5597.3
  Top Layer w10: IC1.16 470,480 470,1235 LED9.6 ; LED11.6 1625,1373 1581,1417 1581,2051 LED7.6 ; LED8.6 2214,2056 2214,1339 LED12.6
  Bottom Layer w10: LED9.6 583.05,1221.95 1011.95,1221.95 LED10.6 1128.05,1231.95 1430.95,1231.95 1469,1270 1469,1310 1497.05,1338.05 1581.95,1338.05 LED11.6 ; LED5.6 564,2051 1026,2051 LED6.6 1133.05,2031.95 1580,2031.95 1595,2046.95 LED7.6 1664,2056 2126,2056 LED8.6
NetIC1_17: IC1.17 LED5.10 LED6.10 LED7.10 LED8.10 LED9.10 LED10.10 LED11.10 LED12.10 | length 6860.1
  Top Layer w10: LED9.10 120,1408 164,1452 164,2051 LED5.10 ; v1(376,1029) 376,658.11 392.16,641.95 392.16,419.84 410,402 492,402 IC1.17 ; LED10.10 626,1334 626,2051 LED6.10 714,2139 900,2139 920,2119 920,2059 1181,1798 ; LED11.10 1181,1339 1181,1798 ; LED7.10 1181,2051 1181,1798
  Bottom Layer w10: v1(376,1029) LED9.10 204,1369 1151,1369 LED11.10 1308.05,1378.05 1696.95,1378.05 LED12.10 ; LED7.10 1260,2095 1303.05,2138.05 1450,2138.05 1470,2118.05 1470,2081.95 1500,2051.95 1555.95,2051.95 1575,2071 1575,2114 1600,2139 1731,2139 LED8.10
NetIC1_18: IC1.18 R1.1 | length 2343.7
  Bottom Layer w10: IC1.18 509,319 160,319 92,251 92,110 113,89 154,89 192,127 192,150 299,257 932,257 979,210 979,110 1020,69 1316,69 1337,90 1337,112 1360,135 R1.1
NetIC1_20: IC1.20 LED5.4 LED6.4 LED7.4 LED8.4 LED9.4 LED10.4 LED11.4 LED12.4 | length 6198.1
  Top Layer w10: LED5.4 464,1539 548,1539 597,1490 597,993 731,859 731,539 IC1.20 ; LED6.4 931,1456 931,729 LED10.4 ; LED11.4 1569,739 1569,1373 1525,1417 LED7.4
  Bottom Layer w10: LED9.4 483.05,621.95 911.95,621.95 LED10.4 1051,609 1484,609 1525,650 LED11.4 1647,573 1948,573 LED12.4 ; LED5.4 483.05,1558.05 906.95,1558.05 LED6.4 ; LED7.4 1569,1451 1686,1451 1726.95,1491.95 1726.95,1543.05 2026.95,1543.05 LED8.4
NetIC1_21: IC1.21 LED5.1 LED6.1 LED7.1 LED8.1 LED9.1 LED10.1 LED11.1 LED12.1 | length 5809.9
  Top Layer w10: LED9.1 76,729 76,1451 LED5.1 ; LED10.1 675,331 792,214 792,110 812.43,89.57 847.4,89.57 867.84,110 867.84,213.41 930,275.58 IC1.21 ; v1(1080,380) 1080,550 LED11.1 1269,739 1269,1373 1225,1417 LED7.1
  Bottom Layer w10: LED9.1 164,729 440,729 476.95,692.05 476.95,665 500,641.95 631.95,641.95 LED10.1 ; LED5.1 164,1451 440,1451 464,1475 464,1509 493.05,1538.05 546.95,1538.05 590,1495 LED6.1 ; IC1.21 990,380 v1(1080,380) ; LED11.1 1308.05,778.05 1696.95,778.05 LED12.1 ; LED7.1 1293,1427 1697,1427 LED8.1
NetIC1_22: IC1.22 LED5.5 LED6.5 LED7.5 LED8.5 LED9.5 LED10.5 LED11.5 LED12.5 | length 4906.4
  Top Layer w10: IC1.22 1030,640 LED10.5 ; LED11.5 1669,739 1669,1451 LED7.5
  Bottom Layer w10: LED9.5 564,729 1031,729 LED10.5 1128.05,631.95 1436.95,631.95 1475,670 1475,713.05 1500,738.05 1581.95,738.05 LED11.5 1691,629 1972,629 2025,682 2025,735 2080,790 2085,790 LED12.5 ; LED5.5 625,1390 965,1390 LED6.5 1133.05,1558.05 1561.95,1558.05 LED7.5 1693.05,1563.05 2106.95,1563.05 LED8.5
NetIC1_23: IC1.23 LED5.2 LED6.2 LED7.2 LED8.2 LED9.2 LED10.2 LED11.2 LED12.2 | length 7047.9
  Top Layer w10: LED9.2 176,729 176,1353 220,1397 LED5.2 ; LED6.2 731,1456 731,1207 775,1163 LED10.2 ; IC1.23 1325,635 LED11.2 1369,739 1369,1451 LED7.2 ; LED8.2 1919,1451 1919,744 LED12.2
  Bottom Layer w10: LED9.2 92,557 92,410 148,354 324,354 380,410 380,458 400,478 1092,478 IC1.23 ; LED5.2 337,1612 972,1612 1014,1570 1014,1478 987,1451 814,1451 LED6.2 ; LED11.2 1388.05,758.05 1628.95,758.05 1731,656 1831,656 LED12.2
NetIC2_1: IC2.1 MOD1.J3_14 R9.1 | length 2558.6
  Top Layer w10: v1(1948.5,4603.5) 1995,4650 R9.1
  Bottom Layer w10: v1(1948.5,4603.5) 1960,4592 2007,4639 2007,4772 2080,4845 2830,4845 MOD1.J3_14 2923,4838 2923,5499 2692,5730 2540,5730 IC2.1
NetIC4_1: IC4.1 K3.1 R12.1 | length 2439.5
  Top Layer w10: IC4.1 410.76,3398 915,3398 952,3361 952,2568 920,2536 400,2536 380,2556 K3.1 380,2869.93 440,2929.93 R12.1
NetIC4_3: IC4.3 K3.2 R13.1 | length 1584.1
  Top Layer w10: K3.2 539,2571 900,2571 932,2603 932,2982.43 850.43,3064 R13.1 850.43,3265 833.43,3282 528.76,3282 510.76,3300 IC4.3
NetK1_1: K1.1 MOD1.J2_15 R6.1 S1.1 | length 4300.9
  Top Layer w10: v1(2100,3410) 2100,4220.72 2137,4257.72 2137,4852 MOD1.J2_15 2320,5035 2320,5950 K1.1 2475,6151 2500,6176 2829.43,6176 2835.43,6170 R6.1
  Bottom Layer w10: S1.1 1568.31,2912.77 1602.77,2912.77 v1(2100,3410)
NetK1_3: K1.3 MOD1.J2_14 R7.1 S2.1 | length 4705.9
  Top Layer w10: MOD1.J2_14 2504,5119 2504,5749.57 2494.57,5759 R7.1 2461,5925 2440,5946 v1(2440,5990)
  Bottom Layer w10: S2.1 2155,3295 2805,3945 2900,3945 2942.72,3987.72 2942.72,4598.28 2900,4641 2334,4641 MOD1.J2_14 ; v1(2440,5990) 2472.83,6022.83 2496.83,6022.83 2522,6048 2522,6128 2564,6170 2610,6170 K1.3
NetK5_4: K5.4 MOD1.J3_7 | length 3852.7
  Bottom Layer w10: K5.4 984,3056 984,3571 733,3822 733,3874 760,3901 1477,3901 2014,4438 2900,4438 2922.72,4415.28 2922.72,4374.72 2900,4352 2859,4352 2837,4330 2837,4138 MOD1.J3_7
NetK5_5: K5.5 MOD1.J3_8 | length 4890.1
  Top Layer w10: v1(1342,3142) 1440,3044 1440,2856 1817,2479 2932,2479 2983,2530 2983,4490 2935,4538 2859,4538 2837.28,4516.28 2837.28,4460.72 2860,4438 2900,4438 2923,4415 2923,4238 MOD1.J3_8
  Bottom Layer w10: K5.5 1112,3142 v1(1342,3142)
NetK5_6: K5.6 MOD1.J3_16 | length 3292.5
  Top Layer w10: K5.6 1388,3518 1603,3518 1635,3550 v1(1635,4642)
  Bottom Layer w10: v1(1635,4642) 1635,4661 2049.85,5075.84 2119,5075.84 2149.84,5045 2830,5045 MOD1.J3_16
NetK6_1: K6.1 T2.1 | length 1673.6
  Bottom Layer w30: T2.1 565,5830 1885,5830 K6.1
NetK6_2: K6.2 T2.5 | length 860.2
  Bottom Layer w30: T2.5 1719.25,6120 2112.8,6120 K6.2
NetK7_1: K7.1 MOD1.J2_9 | length 2260.5
  Bottom Layer w10: MOD1.J2_9 2223,4252 2223,3452 2100,3329 2100,2832 2110,2822 2723.55,2822 K7.1
NetK7_2: K7.2 MOD1.J2_8 | length 1456.3
  Top Layer w10: MOD1.J2_8 2558,3817 2558,3230.45 K7.2
NetK7_3: K7.3 MOD1.J2_7 | length 1665
  Top Layer w10: MOD1.J2_7 2180,4132 2137.28,4174.72 2137.28,4221.28 2159,4243 2291,4243 2662,3872 2662,3226.45 K7.3
NetLED1_1: LED1.1 R2.1 | length 903.9
  Top Layer w10: LED1.1 1220,3129.27 1292.73,3202 1943,3202 1990,3155 R2.1
NetLED2_1: LED2.1 R3.1 | length 793.7
  Top Layer w10: LED2.1 1270,2911.33 1270,3139.27 1312.73,3182 1362,3182 1429,3115 R3.1
NetLED3_1: LED3.1 R4.1 | length 1216.4
  Top Layer w10: LED3.1 1178.13,2684.53 1178.13,3139.4 1260.73,3222 1713.87,3222 1741,3249.13 R4.1
NetLED4_1: LED4.1 R5.2 | length 3276.4
  Top Layer w10: v1(580,2770) 655,2845 740,2845 765,2820 R5.2 ; v1(2231,2748) 2231,3051 LED4.1
  Bottom Layer w10: v1(580,2770) 348,2770 308,2730 308,2570 356,2522 1010,2522 1225,2737 2220,2737 v1(2231,2748)
NetLED4_2: LED4.2 T1.1 | length 2110.8
  Top Layer w10: T1.1 1992.36,3726.64 2004,3715 2004,3430 1956,3382 1956,3256 2053,3256 2099,3210 2099,2636 2125,2610 2195,2610 2271,2686 2271,2991 LED4.2
NetMOD1_J2_5: MOD1.J2_5 R8.2 | length 606.6
  Top Layer w10: v1(1878,3517) 1930,3465 R8.2
  Bottom Layer w10: v1(1878,3517) 2060,3699 2060,3775 MOD1.J2_5
NetMOD1_J3_6: MOD1.J3_6 R2.2 | length 2871
  Top Layer w10: R2.2 2060.87,3048.87 1971,2959 1971,2650 2040,2581 2840,2581 2923,2664 2923,3952 MOD1.J3_6
NetMOD1_J3_11: MOD1.J3_11 R3.2 | length 3678.2
  Top Layer w10: R3.2 1790.43,2575.57 1817,2549 2920,2549 2963,2592 2963,4412 MOD1.J3_11
NetMOD1_J3_15: MOD1.J3_15 R4.2 | length 2676.9
  Top Layer w10: R4.2 1835,3988 2008,4161 2008,4532 2079,4603 v1(2079,5035)
  Bottom Layer w10: v1(2079,5035) 2083,5035 2108,5010 2160,4952 2823,4952 MOD1.J3_15
NetR8_1: R8.1 T1.2 | length 263.1
  Top Layer w10: T1.2 1890,3605.87 R8.1
pads on no net: B1.MH1 B1.MH2 IC1.24 IC4.4 IC4.5 IC4.6 IC4.7 IC4.8 IC4.9 IC4.10 IC4.11 IC4.12 MOD1.J2_1 MOD1.J2_2 MOD1.J2_3 MOD1.J2_4 MOD1.J2_6 MOD1.J2_10 MOD1.J2_11 MOD1.J2_12 MOD1.J2_13 MOD1.J2_16 MOD1.J2_17 MOD1.J3_1 MOD1.J3_2 MOD1.J3_3 MOD1.J3_4 MOD1.J3_5 MOD1.J3_9 MOD1.J3_12 MOD1.J3_13 MOD1.J3_17 MOD1.J3_18 S1.2 S1.4 S2.2 S2.4 T2.6 T2.10

## Polygon pours and split planes (outlines as drawn)
NetC1_2 on Bottom Layer "GROUND_POLYGON" (solid, pour order 1): 50,580 1900,580 1900,130 1790,20 60,20
GND on Bottom Layer "GROUND_POLYGON" (solid, pour order 0): 57.72,4620 2100,4620 2090,4610 2090,2470 330,2470 270,2530 270,2730 110,2730 57.72,2760

## Silkscreen, mask and mechanical layers (free items; w line width, h text height)
Top Overlay:
  text "Student Elektronica ICT" at 2630,5395 h60 r270
  text "Oliwier Jaworski" at 2725,5395 h60 r270
  text "Hogeschool PXL" at 2539.99,5390 h60 r270
Board Outline:
  lines w10: 2265,2335 2270,2335 ; 2270,2335 1555,2335 1530,2360 1580,2410 3007,2410 3007,6011 3007,6280 0,6280 0,2410 720,2410 770,2360 745,2335 0,2335 0,0 1810,0 2270,460 2270,2335

## Text inside footprints (layer, text, board x,y; h text height)
BUZ1: Top Overlay "+" at 1117.95,3542.49 h50.15; Top Overlay "-" at 1679.18,3542.52 h50.09